# EAGLE board OpenPCRGaudi (EAGLE 6.5.0)
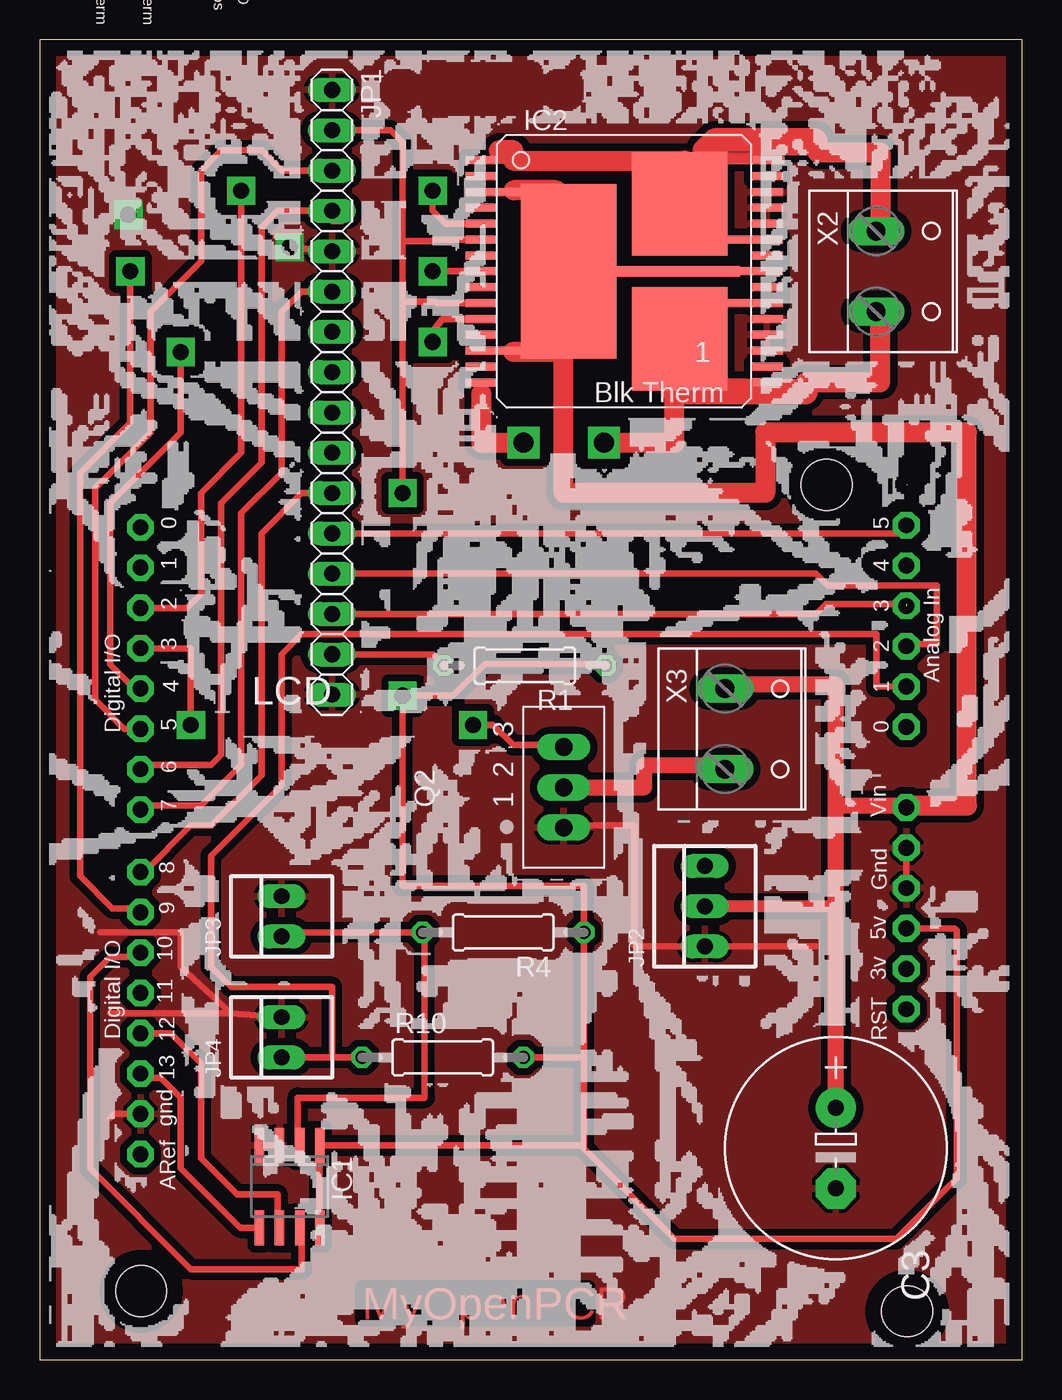
[diagram p0: board, top side]
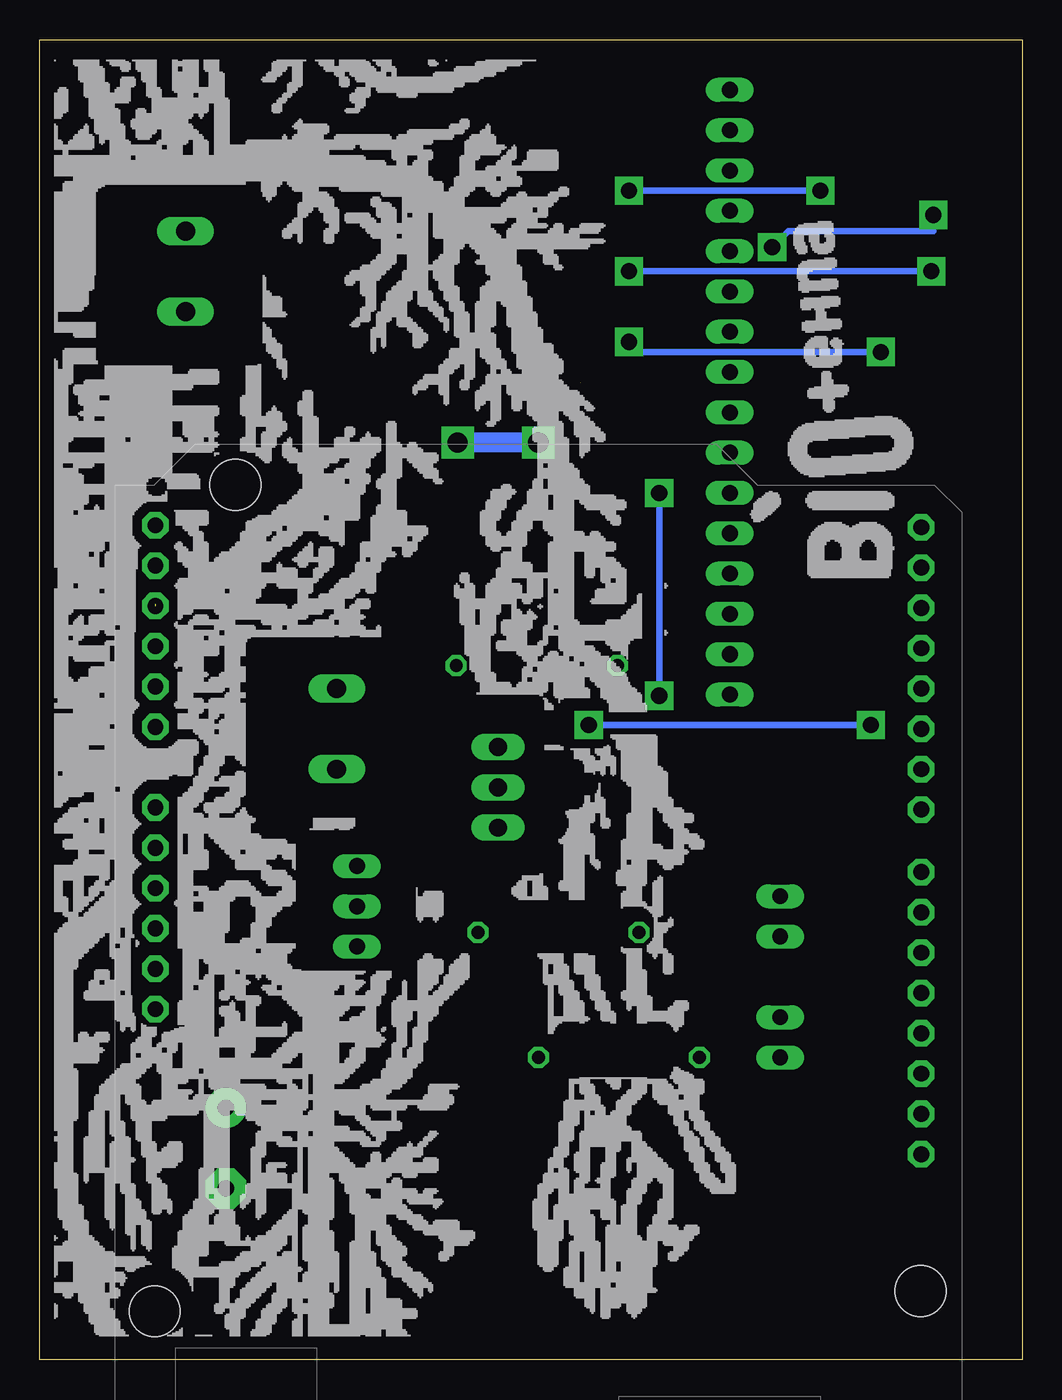
[diagram p1: board, bottom side, seen from below]

Size 61.9 x 83.17 mm. Coordinates in mm from the lower left corner, seen from the top.
Outline: 0,0 61.9,0 61.9,83.17 0,83.17 0,0
Copper layers (1*16): Top 0.035mm / dielectric 1.5mm / Bottom 0.035mm
Design rules "default *": minimum track width 10mil, minimum drill 24mil, track to track 18mil, track to pad 18mil, pad to pad 8mil, via to via 8mil, smd to smd 8mil, copper to edge 40mil, drill to drill 8mil, minimum pad ring 10mil, minimum via ring 8mil, stop-mask expansion 4mil, vias tented up to drill 0mil, thermal gap 10mil
Net classes: 0 default: width 0.381 mm; 1 2A: width 0.762 mm; 2 8A: width 2.54 mm; 3 3A: width 1.016 mm

## Footprints (pad centres in the part's own frame; a part is rotated, then mirrored left to right if it is on the bottom)
E5-13 = drill 1.016 pad 2.54: + -2.54,0 | drill 1.016 pad 2.54 octagon: - 2.54,0
SO-08 = smd 0.6 x 2.2: 1 -1.905,-2.6; 2 -0.635,-2.6; 3 0.635,-2.6; 4 1.905,-2.6; 5 1.905,2.6; 6 0.635,2.6; 7 -0.635,2.6; 8 -1.905,2.6
MULTIPOWERSO-30 = smd 0.508 x 2: 1 -7,-9; 2 -6,-9; 4 -4,-9; 5 -3,-9; 6 -2,-9; 7 -1,-9; 8 0,-9; 9 1,-9; 10 2,-9; 11 3,-9; 12 4,-9; 14 6,-9; 15 7,-9; 16 6.988,9; 17 6,9; 18 5,9; 19 4,9; 20 3,9; 22 1,9; 24 -1,9; 26 -3,9; 27 -4,9; 28 -5,9; 29 -6,9; 30 -7,9.08; GND -7,-9; SS 7,-8.992 | smd 0.508 x 4: 3 -5,-8; 13 5,-8; 21 2,8; 23 0,8; 25 -2,8 | smd 6.5 x 6: OUTA -4.25,3.5; OUTB 4.25,3.5 | smd 11 x 6: VCC 0,-3.5 | smd 0.65 x 8.3: VCC@1 0,3.145
1X16 = drill 1.016 long: 1 -19.05,0; 2 -16.51,0; 3 -13.97,0; 4 -11.43,0; 5 -8.89,0; 6 -6.35,0; 7 -3.81,0; 8 -1.27,0; 9 1.27,0; 10 3.81,0; 11 6.35,0; 12 8.89,0; 13 11.43,0; 14 13.97,0; 15 16.51,0; 16 19.05,0
22-23-2031 = drill 1 long: 1 -2.54,0; 2 0,0; 3 2.54,0
22-23-2021 = drill 1 long: 1 -1.27,0; 2 1.27,0
TO202 = drill 1.118 long: 1 -2.54,-5.08; 2 0,-5.08; 3 2.54,-5.08
0207/10 = drill 0.813 octagon: 1 -5.08,0; 2 5.08,0
ARDUINO = drill 1 pad 1.676 octagon: 3V 36.068,2.54; 5V 38.608,2.54; A0 51.308,2.54; A1 53.848,2.54; A2 56.388,2.54; A3 58.928,2.54; A4 61.468,2.54; A5 64.008,2.54; AREF 24.384,50.8; D0 63.881,50.8; D1 61.341,50.8; D2 58.801,50.8; D3 56.261,50.8; D4 53.721,50.8; D5 51.181,50.8; D6 48.641,50.8; D7 46.101,50.8; D8 42.164,50.8; D9 39.624,50.8; D10 37.084,50.8; D11 34.544,50.8; D12 32.004,50.8; D13 29.464,50.8; GND 26.924,50.8; GND1 43.688,2.54; GND2 41.148,2.54; RESET 33.528,2.54; VIN 46.228,2.54 | hole 3.2: 15.758,50.754; 66.558,7.574; 14.488,2.494
W237-132 = drill 1.194 long: 1 -2.54,-0.635; 2 2.54,-0.635

## Placement (x,y rotation side)
C3  [E5-13]  50.16,13.34 270 top
IC1  MCP3551SN  [SO-08]  15.75,10.92 180 top
IC2  VNH3SP30_2  [MULTIPOWERSO-30]  36.83,68.58 270 top
JP1  [1X16]  18.41,60.96 270 top
JP2  22-23-2031  [22-23-2031]  41.91,28.57 90 top
JP3  22-23-2021  [22-23-2021]  15.24,27.94 90 top
JP4  22-23-2021  [22-23-2021]  15.24,20.32 90 top
Q2  BSS97  [TO202]  27.94,36.07 90 top
R1  [0207/10]  30.57,43.73 180 top
R4  [0207/10]  29.21,26.92 180 top
R10  [0207/10]  25.4,19.05 0 top
U$3  ARDUINODUEMILANOVE  [ARDUINO]  57.15,-11.43 90 top
X2  [W237-132]  53.34,68.58 270 top
X3  [W237-132]  43.81,39.75 270 top

## Library data of the parts
C3 = rcl
IC1 = microchip; MPN: MCP3551-E/SN; OC_FARNELL: 1084625; OC_NEWARK: 97K4494
IC2 = Gaudi; MPN: VNH3SP30-E; OC_FARNELL: 1739420; OC_NEWARK: 33R1486
JP1 = pinhead
JP2 = con-molex; MF: MOLEX; MPN: 22-23-2031; OC_FARNELL: 1462950; OC_NEWARK: 30C0862
JP3 JP4 = con-molex; MF: MOLEX; MPN: 22-23-2021; OC_FARNELL: 1462926; OC_NEWARK: 25C3832
Q2 U$3 = openpcr
R1 R4 R10 = resistor
X2 X3 = con-wago-508; OC_FARNELL: unknown; OC_NEWARK: unknown

## Nets
3V: U$3.3V
+5VREG [2A]: IC1.1 IC1.8 IC2.6 IC2.10 JP1.2 R1.1 R4.1 R10.2 U$3.5V
+12V1 [8A]: C3.+ IC2.3 IC2.13 IC2.23 IC2.VCC IC2.VCC@1 JP2.2 U$3.VIN X3.1
GND1 [2A]: C3.- IC1.3 IC1.4 IC2.18 IC2.19 IC2.20 IC2.26 IC2.27 IC2.28 JP1.1 JP1.5 JP1.16 JP2.1 JP3.2 JP4.2 Q2.1 U$3.GND U$3.GND1 U$3.GND2
N$2: JP1.3 U$3.D5
N$3: JP1.4 U$3.D6
N$4: JP1.14 U$3.A3
N$5: JP1.15 R1.2
N$8: Q2.3 U$3.D3
N$10: JP1.13 U$3.A2
N$11: JP1.6 U$3.D7
N$12: JP1.12 U$3.A5
N$14: IC1.5 U$3.D13
N$18 [3A]: Q2.2 X3.2
N$20: JP1.11 U$3.D8
N$23: IC1.2 JP3.1 R4.2
N$25 [8A]: IC2.1 IC2.25 IC2.30 IC2.GND IC2.OUTA X2.1
N$27: IC1.6 U$3.D12
N$29: IC1.7 U$3.D10
N$30: IC2.8 U$3.D9
N$31: IC2.11 U$3.D4
N$32 [8A]: IC2.15 IC2.16 IC2.21 IC2.OUTB IC2.SS X2.2
N$33: IC2.5 U$3.D2
N$37: JP4.1 R10.1 U$3.A1

## Tracks (layer width: path | path; a pad name or v marks a point on that pad's centre or on a via)
+5VREG  (via drill 1.02 pad 1.78)
  Top 0.406: 34.29,19.05 R10.2 | 34.29,19.05 R4.1 34.29,29.84 22.86,29.84 v22.86,41.84 26.06,41.84 28.06,43.84 35.54,43.84 R1.1 | IC2.10 25.02,66.58 24.92,66.67 22.86,66.67 | 17.78,8.32 IC1.8 IC1.1 34.1,13.52 34.29,13.34 | v22.86,54.61 22.86,66.67 | IC2.6 24.86,70.58 24.77,70.48 22.86,70.48 | U$3.5V 57.66,27.18 57.78,27.05 57.78,11.43 53.98,7.62 40.01,7.62 34.29,13.34 | 34.29,13.34 34.29,19.05 | 22.86,66.67 22.86,70.48 | JP1.2 22.1,77.47 22.86,76.71 22.86,70.48
  Bottom 0.406: v22.86,41.84 v22.86,54.61
+12V1
  Top 0.406: 33.4,68.71 IC2.VCC | 33.4,68.71 33.4,73.71 32.54,73.68 31.39,73.65 | 31.39,73.65 IC2.3 | 33.4,68.71 33.91,68.71 | 33.4,68.71 33.02,68.71 33.02,63.5 33.66,63.5 | 54.61,34.92 U$3.VIN | 43.18,42.55 X3.1 | IC2.23 IC2.VCC@1 IC2.VCC | 27.93,63.59 29.84,63.5 29.77,63.58 IC2.13 | 31.39,73.65 29.85,73.65 29.84,73.66 29.87,73.68 | 31.39,73.65 31.39,69.58 32.38,68.58 IC2.VCC
  Top 0.762: 50.16,28.57 JP2.2
  Top 1.016: 50.16,34.92 54.61,34.92 | 50.16,34.92 50.16,42.55 43.18,42.55 | 50.16,34.92 50.16,28.57 C3.+
  Top 1.27: 54.61,34.92 58.42,34.92 58.42,58.42 45.72,58.42 45.72,54.61 33.02,54.61 33.02,63.5 29.84,63.5 | 32.54,73.68 29.87,73.68
GND1  (via drill 1.02 pad 1.78)
  Top 0.406: IC1.4 IC1.3 | U$3.GND2 U$3.GND1 | Q2.1 33.02,33.66 37.47,33.66 37.47,26.04 JP2.1 48.9,26.04 | U$3.GND 4.7,15.49 4.45,15.24 | 4.43,21.84 12.05,21.84 | 12.05,21.84 JP4.2 | 12.05,21.84 8.89,24.77 8.89,26.92 3.81,26.92 | JP1.5 v15.75,70.1 | v5.59,72.14 5.59,71.63
  Bottom 0.406: v15.75,70.1 14.73,71.12 5.59,71.12 v5.59,72.14
  pour Top: 0,0 62.23,0 62.23,83.19 0,83.19
N$2
  Top 0.406: U$3.D5 5.33,39.75 3.49,41.59 3.49,54.93 6.99,58.42 6.99,66.04 10.16,69.22 10.16,74.93 11.43,76.2 13.97,76.2 15.24,74.93 JP1.3
N$3
  Top 0.406: JP1.4 14.99,72.39 13.97,71.37 13.97,56.52 11.43,53.98 11.43,38.1 10.79,37.47 6.6,37.47 U$3.D6 | JP1.4 19.05,72.39 19.05,71.75 18.41,71.75 JP1.4
N$4  (1 unrouted)
  Top 0.406: 54.61,47.62 49.53,47.62 48.9,46.99 JP1.14
N$5
  Top 0.406: JP1.15 24.77,44.45 R1.2
N$8  (via drill 1.02 pad 1.78)
  Top 0.406: U$3.D3 9.53,44.83 v9.53,40.01 | 33.02,38.73 Q2.3 32.89,38.73 29.84,38.73 28.57,40.01 v27.3,40.01
  Bottom 0.406: v9.53,40.01 v27.3,40.01
N$10
  Top 0.406: U$3.A2 54.61,45.09 56.52,45.09 56.53,48.77 49.65,48.77 48.9,49.53 JP1.13
N$11
  Top 0.406: 6.35,34.29 U$3.D7 6.35,34.92 10.16,34.92 12.7,37.47 12.7,53.34 15.24,55.88 15.24,66.04 16.51,67.31 JP1.6
N$12
  Top 0.406: 54.61,52.7 U$3.A5 54.61,52.07 JP1.12
N$14
  Top 0.406: 6.35,17.78 U$3.D13 6.6,17.78 7.62,17.78 8.89,16.51 8.89,12.06 12.63,8.32 IC1.5
N$18
  Top 1.016: Q2.2 38.1,36.07 38.1,37.47 43.18,37.47 X3.2
N$20
  Top 0.406: 6.35,30.48 U$3.D8 6.6,30.73 9.53,33.66 10.79,33.66 13.97,36.83 13.97,52.07 16.51,54.61 JP1.11
N$23
  Top 0.406: IC1.2 16.26,13.52 16.26,16.51 24.26,16.51 24.26,26.92 R4.2 15.24,26.92 JP3.1
N$25
  Top 0.406: IC2.30 45.09,75.71 45.09,76.07 49.02,76.07 48.9,76.2 | 41.27,75.56 41.27,75.71 | 52.96,71.25 X2.1 | 41.27,75.56 40.64,75.56 40.64,72.83 IC2.OUTA 40.33,70.48 40.01,70.48 40.01,70.58 IC2.25 | IC2.1 27.7,75.56 29.84,75.56 29.84,76.2 | 41.27,75.56 42.55,75.56 | 49.02,76.71 48.9,76.83
  Top 0.762: 41.27,75.71 45.09,75.71
  Top 1.27: 52.96,71.25 52.96,76.07 49.02,76.07 49.02,76.71 | 29.84,75.56 40.64,75.56 | 29.84,76.2 28.94,76.2
  Top 1.524: 48.9,76.83 42.55,76.83 41.91,76.2
N$27
  Top 0.406: IC1.6 14.99,8.32 14.99,10.41 12.45,10.41 10.16,12.7 10.16,18.67 8.26,20.57 U$3.D12
N$29
  Top 0.406: IC1.7 16.51,8.32 16.51,5.71 9.53,5.71 3.17,12.06 3.17,24.13 4.45,25.4 6.35,25.4 U$3.D10
N$30  (via drill 1.02 pad 1.78)
  Top 0.406: U$3.D9 6.35,28.45 4.57,28.45 2.54,30.48 2.54,55.88 5.71,59.05 v5.71,68.58 | v24.77,68.58 IC2.8
  Bottom 0.406: v5.71,68.58 v24.77,68.58
N$31  (via drill 1.02 pad 1.78)
  Top 0.406: U$3.D4 5.97,42.29 4.45,43.81 4.45,53.98 8.89,58.42 v8.89,63.5 | v24.77,64.14 24.77,64.77 25.4,65.57 27.66,65.57 IC2.11
  Bottom 0.406: v8.89,63.5 24.13,63.5 v24.77,64.14
N$32  (via drill 1.27 pad 2.03)  (1 unrouted)
  Top 0.406: 40.51,61.72 IC2.16 45.7,61.59 48.26,61.59 48.26,60.96 | 40.51,61.72 40.51,61.59 | 52.96,66.17 X2.2 | 52.7,61.59 52.96,61.59 | 38.48,61.71 38.48,61.59 38.1,61.59 38.22,61.72 40.01,61.72 40.51,61.72 | IC2.21 40.64,66.58 40.64,66.67 40.33,66.67 IC2.OUTB 40.51,64.33 40.51,61.72 | 27.84,60.86 27.94,60.33
  Top 0.508: 27.84,60.86 IC2.SS
  Top 1.27: 52.96,61.59 52.96,66.17 | 40.01,61.72 40.01,60.96 40.01,57.78 v35.56,57.78 | v30.48,57.78 27.84,57.78 27.84,60.86 | 48.26,61.59 52.7,61.59
  Top 1.524: 40.01,60.96 48.26,60.96
  Bottom 1.27: v30.48,57.78 v35.56,57.78
N$33  (via drill 1.02 pad 1.78)
  Top 0.406: U$3.D2 9.27,47.37 10.16,48.26 10.16,54.61 12.7,57.15 v12.7,73.66 | IC2.5 25.57,71.58 24.77,72.39 v24.77,73.66
  Bottom 0.406: v12.7,73.66 v24.77,73.66
N$37
  Top 0.406: 18.41,19.05 R10.1 | U$3.A1 52.7,42.42 52.7,45.72 16.51,45.72 15.24,44.45 15.24,36.2 10.79,31.75 10.79,24.77 12.06,23.5 18.41,23.5 18.41,19.05 | JP4.1 18.41,19.05

## Text on the board
Top: MyOpenPCR
_tsilk: Pelt GND | Lid Therm | Lid Therm | Lid Htr | Pelt Pos | Lid Htr | 1 | Blk Therm | openpcr.org | LCD | Rev 1.0 | 1 | 1